# Altium PCB 5.23.PcbDoc
Units mil, origin at the board's own origin, x right, y up, seen from the top; angles counter-clockwise.
Board outline 5000 x 4000 mil, 2 copper layers (Top Layer, Bottom Layer); 44 components, 47 nets, 155 pads, 7 vias.
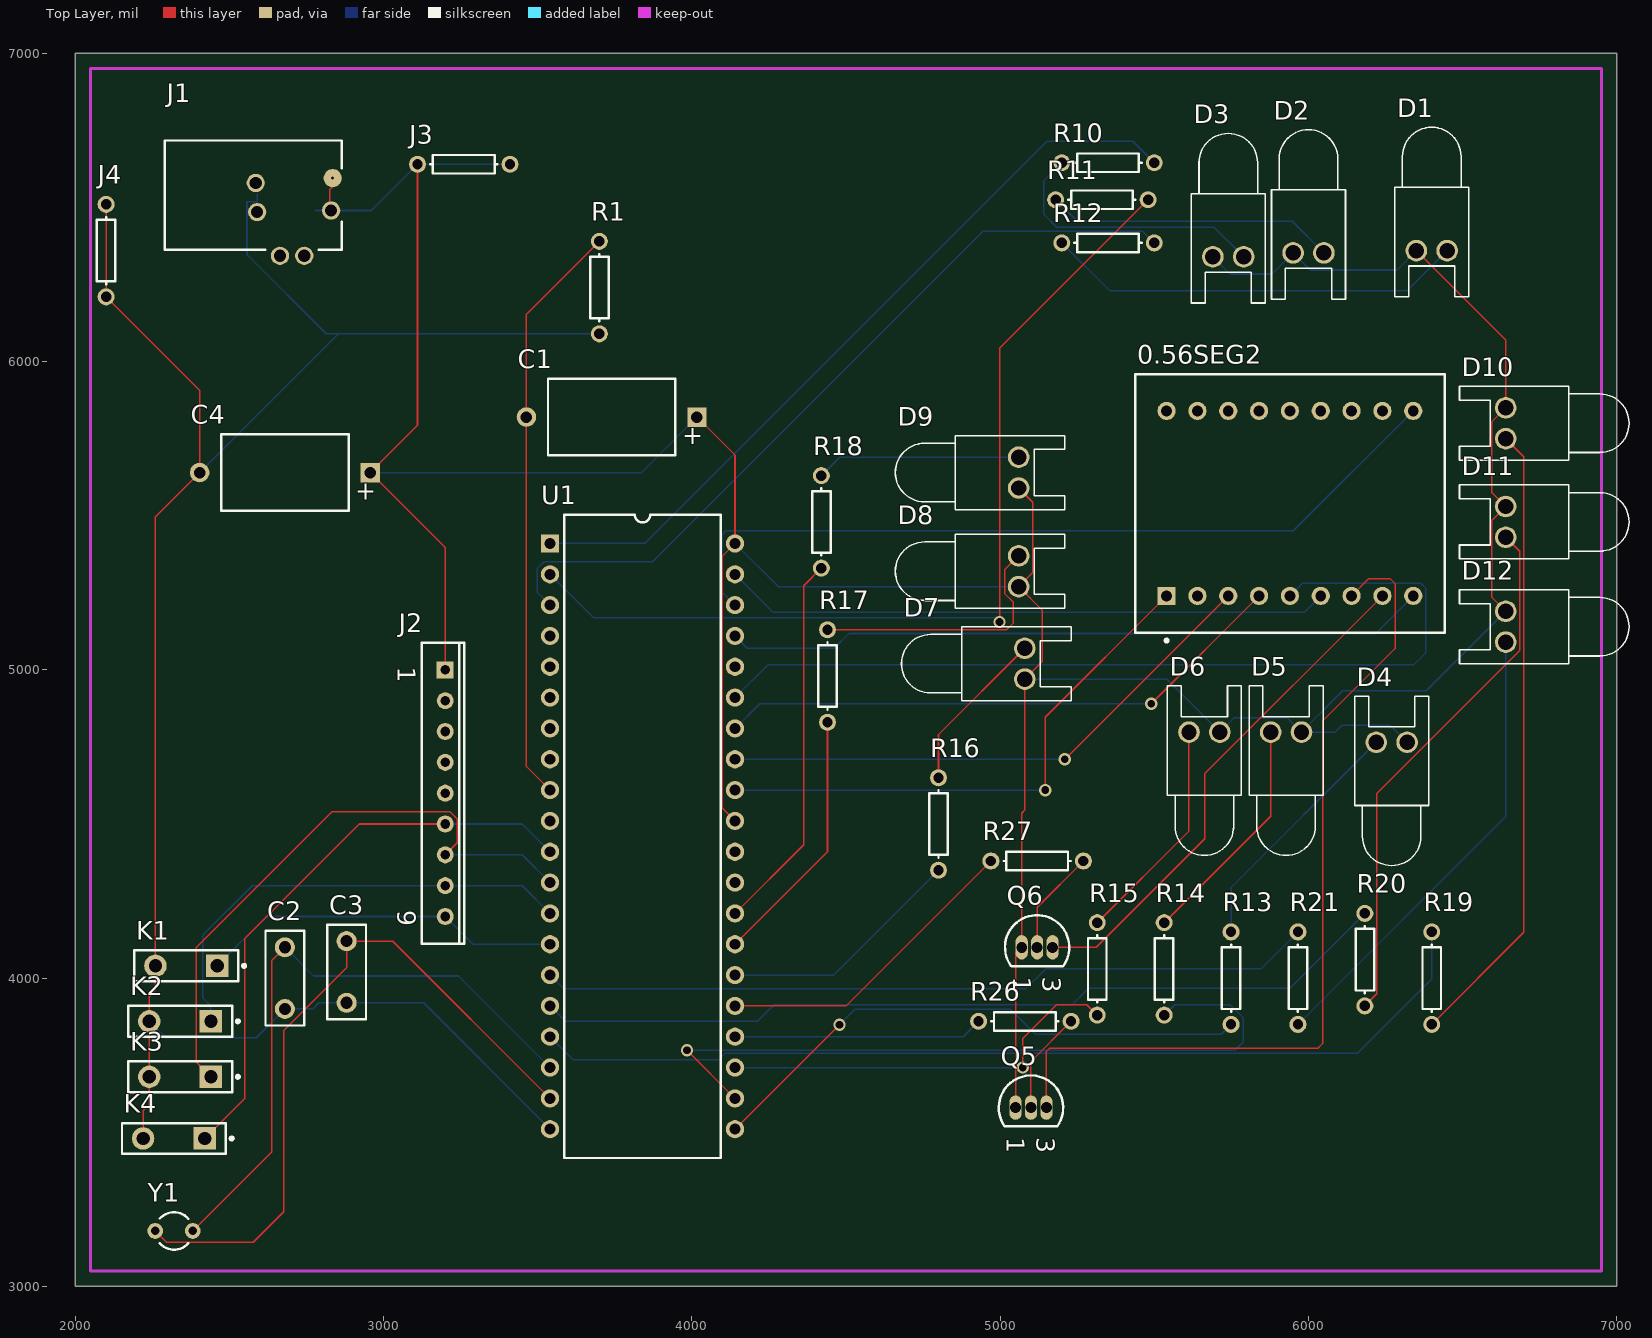
[diagram p0: Top Layer view]
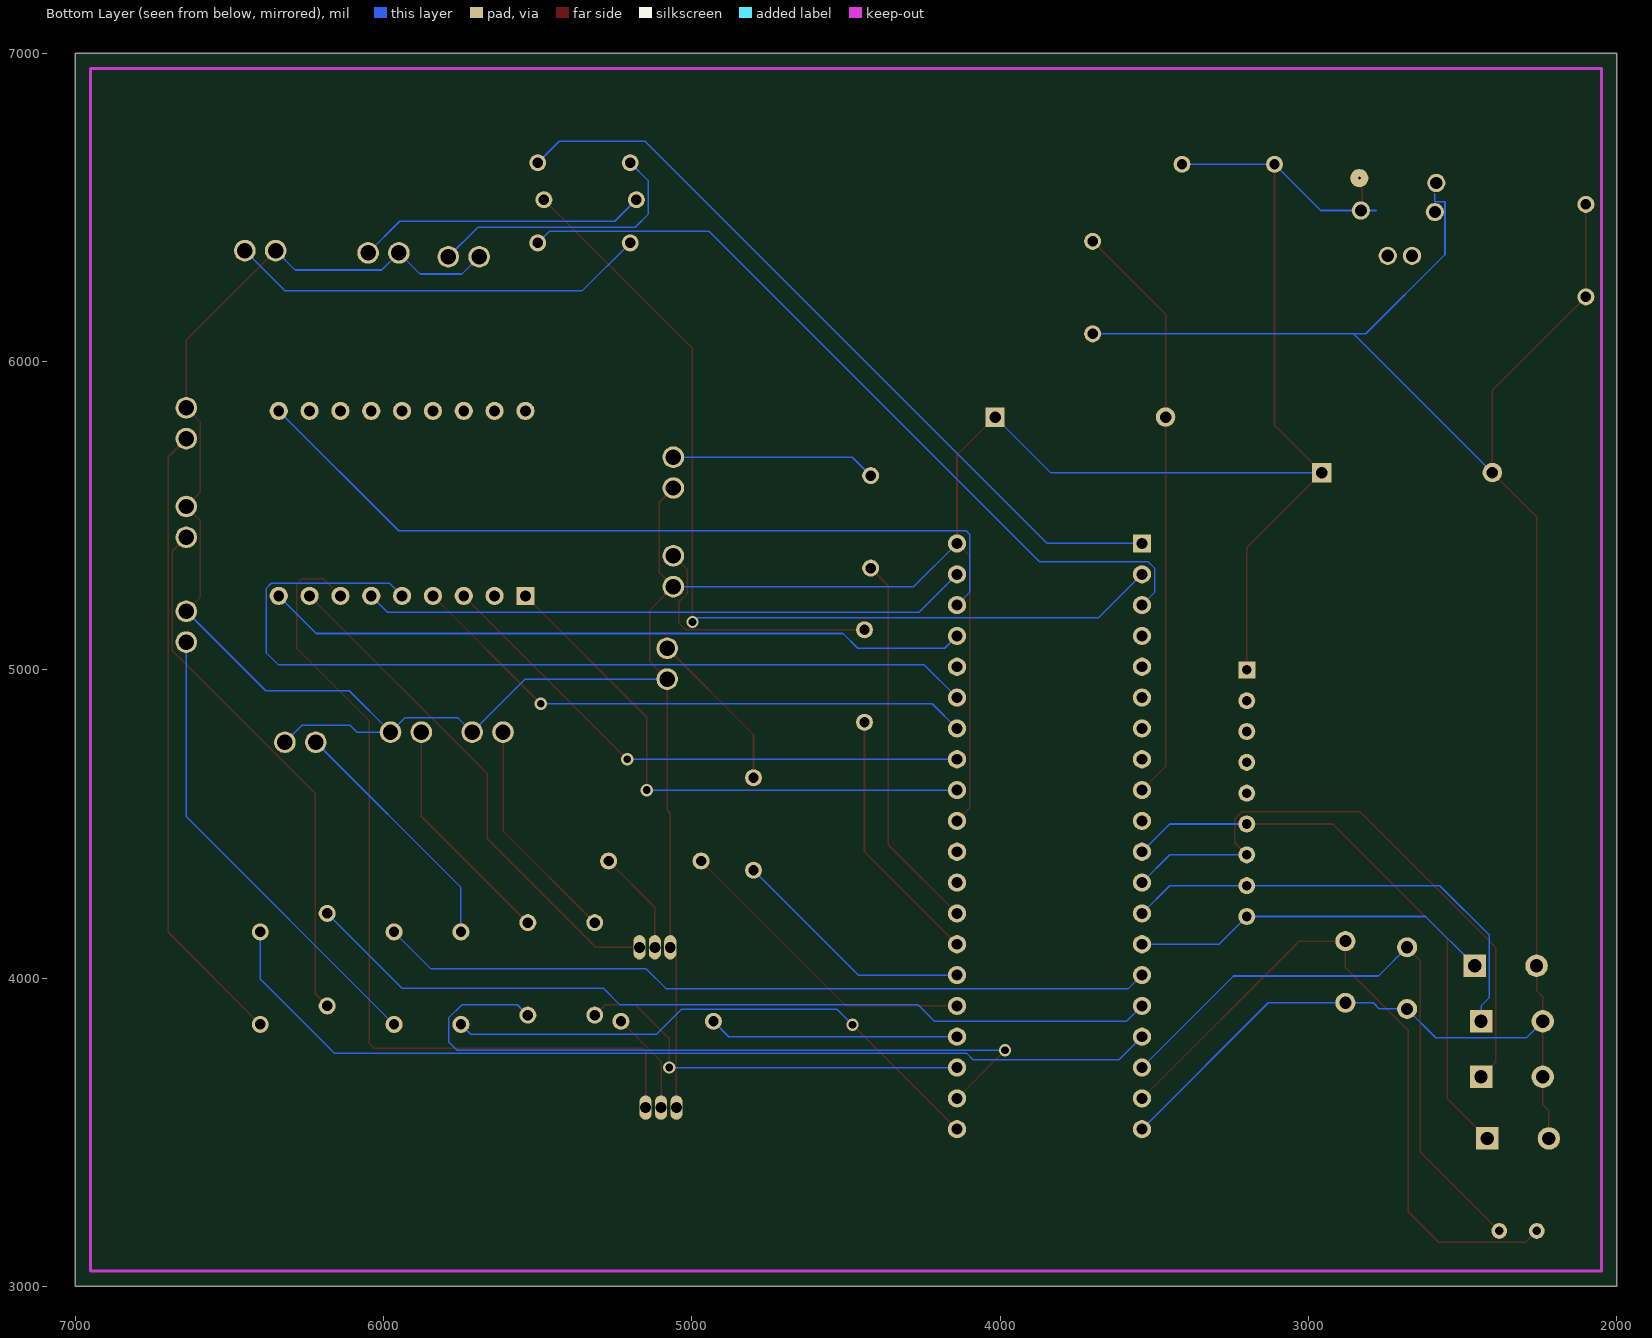
[diagram p1: Bottom Layer view, seen from below]

## Layer stack, top to bottom
Top Layer: signal copper 1.4
Dielectric: dielectric 12.6, FR-4, Dk 4.8
Bottom Layer: signal copper 1.4

## Board outline
2000,3000 7000,3000 7000,7000 2000,7000

## Design rules (kind name [scope] priority, off if disabled: settings)
Clearance [All] p1: gap=0
FabricationTestPointUsage TestPointUsage [All] p1: valid=0 allowmultiple=FALSE
FabricationTestpoint Testpoint [All] p1: side=3 testpointundercomponent=TRUE minsize=40 maxsize=100 preferedsize=60 minholesize=0 maxholesize=40 preferedholesize=32 testpointgrid=1 allowsidetop=TRUE allowsidebottom=TRUE usegrid=TRUE gridtolerance=0.01
Height [All] p1: minheight=0 maxheight=39370.08 prefheight=500
HoleSize [All] p1: absolutevalues=TRUE maxlimit=100 minlimit=0 maxpercent=80.000 minpercent=20.000
PolygonConnect [All] p1: connectstyle=Relief reliefconductorwidth=10 reliefentries=4 polygonreliefangle="90 Angle" airgapwidth=10
RoutingVias [All] p1: holewidth=25 width=40 viastyle="Through Hole" minholewidth=28 minwidth=50 maxholewidth=28 maxwidth=50
SilkscreenOverComponentPads [All] p1: minsilkscreentomaskgap=10
SolderMaskExpansion [All] p1: expansion=4
Width [All] p1: maxlimit=5 minlimit=5 preferedwidth=5
23 further rules are at their usual default settings.

## Components (designator, comment, footprint, x,y, rotation, side; value= is the part's Value field where it differs from the comment)
0.56SEG2 "LED-2NUMBER" LEDDIP-18ANUM 5940,5540 r0 top
C1 "CAPACITOR" CAPPA14.05-10.5x6.3 3740,5820 r180 top
C2 "CAP" CAPR5.08-7.8x3.2 2680,4000 r90 top
C3 "CAP" CAPR5.08-7.8x3.2 2880,4020 r90 top
C4 "CAPACITOR" CAPPA14.05-10.5x6.3 2680,5640 r180 top
D1 "LED" LED-0 6400,6360 r180 top
D2 "LED" LED-0 6000.2,6352.5 r180 top
D3 "LED" LED-0 5740,6340 r180 top
D4 "LED" LED-0 6270,4765 r0 top
D5 "LED" LED-0 5927.5,4798.01 r0 top
D6 "LED" LED-0 5662.5,4798.01 r0 top
D7 "LED" LED-0 5080,5020 r270 top
D8 "LED" LED-0 5060,5320 r270 top
D9 "LED" LED-0 5060,5640 r270 top
D10 "LED" LED-0 6640,5800 r90 top
D11 "LED" LED-0 6640,5480 r90 top
D12 "LED" LED-0 6640,5140 r90 top
J1 "PWR2.5" KLD-0202 2290,6540 r0 top
J2 "A09-103" SIP9 3200,4600 r270 top
J3 "CON2" AXIAL-0.3 3260,6640 r180 top
J4 "CON2" AXIAL-0.3 2100,6360 r90 top
K1 "SW-PB" SPST-2 2360,4040 r180 top
K2 "SW-PB" SPST-2 2340,3860 r180 top
K3 "SW-PB" SPST-2 2340,3680 r180 top
K4 "SW-PB" SPST-2 2320,3480 r180 top
Q5 "8550" BCY-W3 5100,3580 r270 top
Q6 "8550" BCY-W3 5120,4100 r270 top
R1 "RES" AXIAL-0.3 3700,6240 r90 top
R10 "RES" AXIAL-0.3 5350,6645 r0 top
R11 "RES" AXIAL-0.3 5330,6525 r0 top
R12 "RES" AXIAL-0.3 5350,6385 r0 top
R13 "RES" AXIAL-0.3 5749,4000 r90 top
R14 "RES" AXIAL-0.3 5532,4030 r90 top
R15 "RES" AXIAL-0.3 5315,4030 r90 top
R16 "RES" AXIAL-0.3 4800,4500 r90 top
R17 "RES" AXIAL-0.3 4440,4980 r90 top
R18 "RES" AXIAL-0.3 4420,5480 r90 top
R19 "RES" AXIAL-0.3 6400,4000 r90 top
R20 "RES" AXIAL-0.3 6183,4060 r90 top
R21 "RES" AXIAL-0.3 5966,4000 r90 top
R26 "RES" AXIAL-0.3 5080,3860 r180 top
R27 "RES" AXIAL-0.3 5120,4380 r180 top
U1 "AT89S52" DIP40 3840,4460 r270 top
Y1 "CRYSTAL" R38 2320,3180 r90 top

## Footprints (in the part's own frame and the unit in brackets; to place one, negate y for a bottom-side part, rotate by r counter-clockwise, add the part's x,y. Pads: shape width x height; smd on the part's side, far side on the other; paste and mask are expansions set on the pad)
AXIAL-0.3 [mm] "Resistor; 2 L"
  round 1.4 hole 0.85: 1(-3.81,0) 2(3.81,0)
  silkscreen extent -2.77,-0.76 2.77,0.76
BCY-W3 [mm] "TO, Flat Index; 3 In-Line, Axial Leads; Body Dia. 4"
  oval 2x1 hole 0.9: 1(0,-1.27) 2(0,0) 3(0,1.27)
  silkscreen extent -2.65,-2.65 1.55,2.65
CAPPA14.05-10.5x6.3 [mm] "Capacitor, Axial, Polarised; Body 10.5 x 6.3 mm (LxDia. max), Lead Dia. 0.6 mm (ty"
  rect 1.6x1.6 hole 0.95: 1(-7.025,0)
  round 1.6 hole 0.95: 2(7.025,0)
  silkscreen extent -5.25,-3.15 5.25,3.15
CAPR5.08-7.8x3.2 [mm] "Capacitor, Ceramic, Thru-Hole, Dipped Radial; Body 7.8 x 3.2 mm (WxT) Pin Spacing 5.08 m"
  round 1.65 hole 1: 1(-2.54,0) 2(2.54,0)
  silkscreen extent -3.9,-1.6 3.9,1.6
DIP40 [mm] "DIP; 40 Leads; Row Spacing 15.24 mm; Pitch 2.54"
  rect 1.5x1.5 hole 0.9: 1(-24.13,-7.62)
  round 1.5 hole 0.9: 2(-21.59,-7.62) 3(-19.05,-7.62) 4(-16.51,-7.62) 5(-13.97,-7.62) 6(-11.43,-7.62) 7(-8.89,-7.62) 8(-6.35,-7.62) 9(-3.81,-7.62) 10(-1.27,-7.62) 11(1.27,-7.62) 12(3.81,-7.62) 13(6.35,-7.62) 14(8.89,-7.62) 15(11.43,-7.62) 16(13.97,-7.62) 17(16.51,-7.62) 18(19.05,-7.62) 19(21.59,-7.62) 20(24.13,-7.62) 21(24.13,7.62) 22(21.59,7.62) 23(19.05,7.62) 24(16.51,7.62) 25(13.97,7.62) 26(11.43,7.62) 27(8.89,7.62) 28(6.35,7.62) 29(3.81,7.62) 30(1.27,7.62) 31(-1.27,7.62) 32(-3.81,7.62) 33(-6.35,7.62) 34(-8.89,7.62) 35(-11.43,7.62) 36(-13.97,7.62) 37(-16.51,7.62) 38(-19.05,7.62) 39(-21.59,7.62) 40(-24.13,7.62)
  silkscreen extent -26.5,-6.45 26.5,6.45
KLD-0202 [mm] "DC Power Jack, 2.5mm, KLD Series, PCB Mou"
  round 1.5 hole 1: 1A(13.716,-1.27) 2A(7.62,-1.397) 2B(7.5,1) 3A(9.5,-5) 3B(11.5,-5)
  round 1.5 hole 0.254: 1B(13.843,1.397)
  silkscreen extent 0,-4.5 14.6,4.5
LED-0 [mil] "Typical INFRARED GaAs LED; 2 Lea"
  round 70 hole 50: 1(50,0) 2(-50,0)
  silkscreen extent -120,-400 120,150
LEDDIP-18ANUM [mm] "LED, Alphanumeric Display, 13.8 mm, Dual Character; 18 Leads; Row Space 15.24 mm; Pitch 2.5"
  rect 1.5x1.5 hole 0.9: 1(-10.16,-7.62)
  round 1.5 hole 0.9: 2(-7.62,-7.62) 3(-5.08,-7.62) 4(-2.54,-7.62) 5(0,-7.62) 6(2.54,-7.62) 7(5.08,-7.62) 8(7.62,-7.62) 9(10.16,-7.62) 10(10.16,7.62) 11(7.62,7.62) 12(5.08,7.62) 13(2.54,7.62) 14(0,7.62) 15(-2.54,7.62) 16(-5.08,7.62) 17(-7.62,7.62) 18(-10.16,7.62)
  silkscreen extent -12.75,-11.42 12.75,10.65
R38 [mm] "Crystal, Thru-Hole; 2 Leads; Body 3.1 x 8.2 mm ("
  round 1.3 hole 0.7: 1(0,1.55) 2(0,-1.55)
  silkscreen extent -1.55,-1.19 1.55,1.17
SIP9 [mm] "TO, Thru-Hole, Vertical, Heatsink Mounted; 9 In-Line Leads; Pitch 2"
  rect 1.4x1.4 hole 0.8: 1(-10.16,0)
  round 1.4 hole 0.8: 2(-7.62,0) 3(-5.08,0) 4(-2.54,0) 5(0,0) 6(2.54,0) 7(5.08,0) 8(7.62,0) 9(10.16,0)
  silkscreen extent -12.4,-1.95 12.4,1.55
SPST-2 [mm] "Circuit Breaker; 2 Lea"
  rect 1.85x1.85 hole 1.1: 1(-2.54,0)
  round 1.85 hole 1.1: 2(2.54,0)
  silkscreen extent -4.89,-1.27 4.28,1.27

## Part data
C1 C4: "Capacitor"
C2 C3: "Capacitor，电容"
J1: "Low Voltage Power Supply Connector"
J2: library part RES-ROW, "排阻"
J3 J4: "Connector"
Q5 Q6: "PNP Transistor"
U1: library part AT89S5X
Y1: "Crystal，晶振"

## Via types
v1: diameter 40, hole 25, Top Layer to Bottom Layer, 7 vias

## Nets (pads, with @x,y where several pads share a name; then routed paths per layer and width w, separated by ;. In a path a pad name is that pad's centre, name@x,y a point inside that pad or via, vN(x,y) a via of type N, cw(c..) or ccw(c..) an arc to the next point about the centre after c; other vN are vias at no path point)
BG: D3.2 R10.1 | length 897
  Bottom Layer w5: R10.1 5141,6586 5141,6479.06 5184,6436.06 5693.94,6436.06 D3.2
BR: D1.2 R12.1 | length 1368.9
  Bottom Layer w5: R12.1 5356,6229 6319,6229 D1.2
BY: D2.2 R11.1 | length 941.7
  Bottom Layer w5: R11.1 5250,6455 5947.7,6455 D2.2
C1: 0.56SEG2.8 Q6.3 | length 1666.4
  Top Layer w5: Q6.3 5312,4100 5664,4452 5664,4664 0.56SEG2.8
C2: 0.56SEG2.7 Q5.3 | length 2848.9
  Top Layer w5: Q5.3 5150,3762 5160,3772 6030,3772 6046,3788 6046,4834 6281,5069 6281,5280 6265,5296 6196,5296 0.56SEG2.7
DG: D12.2 R21.1 | length 1519.2
  Bottom Layer w5: R21.1 6640,4524 D12.2
DR: D10.2 R19.1 | length 2047.9
  Top Layer w5: R19.1 6698.5,4148.5 6698.5,5691.5 D10.2
DY: D11.2 R20.1 | length 1747
  Top Layer w5: R20.1 6222,3949 6222,4599 6685.5,5062.5 6685.5,5384.5 D11.2
GND: C2.1 C3.1 C4.2 J4.1 J4.2 K1.2 K2.2 K3.2 K4.2 R1.1 U1.20 | length 6887.1
  Top Layer w5: J4.2 J4.1 2403.42,5906.58 C4.2 2260,5496.58 K1.2 2260,3960 2240,3940 K2.2 K3.2 2240,3590 2220,3570 K4.2
  Bottom Layer w5: K2.2 2293,3807 2587,3807 C2.1 2770,3900 2790,3920 C3.1 3130,3920 U1.20 ; C4.2 2853.42,6090 ; 2590,6545 2590,6518 2557,6518 2557,6347 2814,6090 2853.42,6090 ; R1.1 2853.42,6090
NetQ5_2: Q5.2 R26.1 | length 333.8
  Top Layer w5: Q5.2 5100,3730 R26.1
NetQ6_2: Q6.2 R27.1 | length 342.1
  Top Layer w5: Q6.2 5120,4230 R27.1
NetR10_2: R10.2 U1.1 | length 2529.5
  Bottom Layer w5: U1.1 3847,5410 5152,6715 5430,6715 R10.2
NetR11_2: R11.2 U1.2 | length 3091.9
  Top Layer w5: v1(4998,5155) 4998,6043 R11.2
  Bottom Layer w5: U1.2 3681,5169 4984,5169 v1(4998,5155)
NetR12_2: R12.2 U1.3 | length 2606.5
  Bottom Layer w5: U1.3 3499,5251 3499,5330 3520,5351 3872,5351 4944.06,6423.06 5461.94,6423.06 R12.2
NetR13_1: R13.1 U1.21 | length 1816.9
  Top Layer w5: U1.21 v1(4479,3849)
  Bottom Layer w5: v1(4479,3849) 4529,3899 5034,3899 5115,3818 5717,3818 R13.1
NetR14_1: R14.1 U1.22 | length 2402.9
  Top Layer w5: v1(3984,3766) U1.22
  Bottom Layer w5: v1(3984,3766) 5762,3766 5788,3792 5788,3872 5746,3914 5566,3914 R14.1
NetR15_1: R15.1 U1.23 | length 1328.6
  Top Layer w5: v1(5073,3710) 5073,3804 5183,3914 5281,3914 R15.1
  Bottom Layer w5: U1.23 v1(5073,3710)
NetR16_1: R16.1 U1.26 | length 800.8
  Bottom Layer w5: U1.26 4460,4010 R16.1
NetR17_1: R17.1 U1.27 | length 844.3
  Top Layer w5: U1.27 4440,4410 R17.1
NetR18_1: R18.1 U1.28 | length 1236
  Top Layer w5: U1.28 4363,4433 4363,5273 R18.1
NetR19_2: R19.2 U1.17 | length 3152.8
  Bottom Layer w5: U1.17 3615.2,3734.8 4086.97,3734.8 4109.15,3756.97 6159.97,3756.97 6400,3997 R19.2
NetR20_2: R20.2 U1.16 | length 2808.7
  Bottom Layer w5: U1.16 3590,3860 4213,3860 4266,3913 5233,3913 5287,3967 5940,3967 R20.2
NetR21_2: R21.2 U1.15 | length 2520.4
  Bottom Layer w5: U1.15 3584,3966 5084,3966 5148,4030 5846,4030 R21.2
NG: D6.2 R15.2 | length 741.2
  Top Layer w5: R15.2 5612.5,4477.5 D6.2
NR: D4.2 R13.2 | length 810.1
  Bottom Layer w5: R13.2 5749,4294 D4.2
NY: D5.2 R14.2 | length 761.1
  Top Layer w5: R14.2 5877.5,4525.5 D5.2
P00: 0.56SEG2.6 U1.39 | length 1973.6
  Bottom Layer w5: U1.39 4263.79,5186.21 5986.21,5186.21 0.56SEG2.6
P01: 0.56SEG2.10 U1.38 | length 2653.7
  Bottom Layer w5: U1.38 4099,5251 4099,5440 4110,5451 5951,5451 0.56SEG2.10
P02: 0.56SEG2.9 U1.37 | length 2287
  Bottom Layer w5: U1.37 4180,5070 4462,5070 4510,5118 6218,5118 0.56SEG2.9
P03: U1.36
P04: 0.56SEG2.5 U1.35 | length 2974.5
  Bottom Layer w5: U1.35 4246,5016 6341,5016 6381,5056 6381,5264 6364,5281 5981,5281 0.56SEG2.5
P05: 0.56SEG2.4 U1.34 | length 1878.1
  Top Layer w5: v1(5490,4890) 0.56SEG2.4
  Bottom Layer w5: U1.34 4220,4890 v1(5490,4890)
P06: 0.56SEG2.3 U1.33 | length 1819.5
  Top Layer w5: v1(5210,4710) 0.56SEG2.3
  Bottom Layer w5: U1.33 v1(5210,4710)
P07: 0.56SEG2.1 U1.32 | length 1799.2
  Top Layer w5: v1(5146,4610) 5146,4846 0.56SEG2.1
  Bottom Layer w5: U1.32 v1(5146,4610)
P23: R26.2 U1.24 | length 810.7
  Bottom Layer w5: U1.24 4880,3810 R26.2
P24: R27.2 U1.25 | length 1024.7
  Top Layer w5: U1.25 4500,3910 R27.2
P31: J2.6 K4.1 U1.11 | length 1883.8
  Top Layer w5: K4.1 2549,3609 2549,4128 2921,4500 J2.6
  Bottom Layer w5: J2.6 3450,4500 U1.11
P32: J2.7 K3.1 U1.12 | length 1986.3
  Top Layer w5: K3.1 2393,3727 2393,4100 2832,4539 3216,4539 3239,4516 3239,4439 J2.7
  Bottom Layer w5: J2.7 3450,4400 U1.12
P33: J2.8 K2.1 U1.13 | length 1521.2
  Bottom Layer w5: K2.1 2440,3910 2413,3937 2413,4139 2574,4300 J2.8 3450,4300 U1.13
P34: J2.9 K1.1 U1.14 | length 1183.6
  Bottom Layer w5: K1.1 2620,4200 J2.9 3290,4110 U1.14
RST: C1.2 R1.2 U1.9 | length 1909.7
  Top Layer w5: U1.9 3463.42,4686.58 C1.2 3463.42,6153.42 R1.2
VCC: C1.1 C4.1 D1.1 D2.1 D3.1 D4.1 D5.1 D6.1 D7.1 D8.1 D9.1 D10.1 D11.1 D12.1 J1.1A J1.1B J2.1 J3.1 J3.2 Q5.1 Q6.1 U1.31 U1.40 | length 12564.5
  Top Layer w5: J1.1A 2825,6495 2825,6530 2825,6557 2835,6567 J1.1B ; J3.2 3110,5793.43 C4.1 3200,5396.57 J2.1 ; C1.1 4140,5696.57 U1.40 4099,5369 4099,4551 U1.31 ; Q5.1 5050,4080 Q6.1 5070,4535 5080,4545 D7.1 5136,5026 5136,5194 D8.1 5106,5316 5106,5544 D9.1 ; D1.1 6640,6070 D10.1 6594,5804 6594,5576 D11.1 6594,5484 6594,5236 D12.1
  Bottom Layer w5: 2780,6490 J1.1A 2960,6490 J3.2 J3.1 ; C4.1 3836.57,5640 C1.1 ; U1.40 4280,5270 D8.1 ; D7.1 5540.51,4970 D6.1 5758.49,4844 5931.51,4844 D5.1 ; D3.1 5746,6284 5881.7,6284 D2.1 6005.7,6297 6287,6297 D1.1 ; D4.1 6264,4821 6109.99,4821 6087,4798.01 D5.1 ; D12.1 6382,4932 6111.49,4932 D5.1
X1: C3.2 U1.19 Y1.1 | length 2307.1
  Top Layer w5: Y1.1 2295.98,3143 2577,3143 2676,3242 2676,3830 2880,4034 C3.2 3030,4120 U1.19
X2: C2.2 U1.18 Y1.2 | length 2065.4
  Top Layer w5: Y1.2 2637,3435.98 2637,4057 C2.2
  Bottom Layer w5: C2.2 2773,4007 3243,4007 U1.18
XG: D9.2 R18.2 | length 664.9
  Bottom Layer w5: R18.2 4480,5690 D9.2
XR: D7.2 R16.2 | length 536
  Top Layer w5: R16.2 4800,4790 D7.2
XY: D8.2 R17.2 | length 860.8
  Top Layer w5: R17.2 5021,5130 5043,5152 5043,5219.5 5014.5,5248 5014.5,5324.5 D8.2
pads on no net: 0.56SEG2.2 0.56SEG2.11 0.56SEG2.12 0.56SEG2.13 0.56SEG2.14 0.56SEG2.15 0.56SEG2.16 0.56SEG2.17 0.56SEG2.18 J1.2A J1.2B J1.3A J1.3B J2.2 J2.3 J2.4 J2.5 U1.4 U1.5 U1.6 U1.7 U1.8 U1.10 U1.29 U1.30

## Keep-outs
Keep-Out Layer:
  lines w10: 2050,3050 6950,3050 6950,6950 2050,6950 2050,3050

## Silkscreen, mask and mechanical layers (free items; w line width, h text height)
Drill Drawing:
  text ".LEGEND" at 7200,3200 h60
  text "Drill Drawing." at 7200,3100 h60

## Dimensions
2050,3050 to 6950,3050 on Mechanical 1
2050,3050 to 2050,6950 on Mechanical 1

## Text inside footprints (layer, text, board x,y; h text height)
C1: Top Overlay "+" at 4036.26,5783.58 h59.06 r180
C4: Top Overlay "+" at 2976.26,5603.58 h59.06 r180
J1: Mechanical 1 "Alert PCB fab to slot details" at 2301.26,6778.81 h11.81; Mechanical 1 "Assign keep-out area to slot" at 2301.26,6798.5 h11.81; Mechanical 1 "Mech 1 - Slot cut-out" at 2301.26,6759.13 h11.81; Mechanical 1 "Mech 2 - Clearance, move to internal plane if present" at 2301.26,6739.44 h11.81
J2: Top Overlay "9" at 3045.47,4219.69 h59.06 r270; Top Overlay "1" at 3045.47,5009.84 h59.06 r270
Q5: Top Overlay "1" at 5022.09,3484.68 h59.05 r270; Top Overlay "3" at 5118.39,3484.68 h59.05 r270
Q6: Top Overlay "1" at 5042.09,4004.68 h59.05 r270; Top Overlay "3" at 5138.39,4004.68 h59.05 r270